# Altium PCB VAMoS PCB RevB.PcbDoc (part 2 of 3)
Units mm, origin at the board's own origin, x right, y up, seen from the top; angles counter-clockwise.
Board outline 96.93 x 94.75 mm, 4 copper layers (Top Signal Layer, Power Plane, Ground Plane, Bottom Signal Layer), stack 1.66 mm thick; 217 components, 103 nets, 623 pads, 255 vias.
Unrouted connection lines stored in the file: 51.
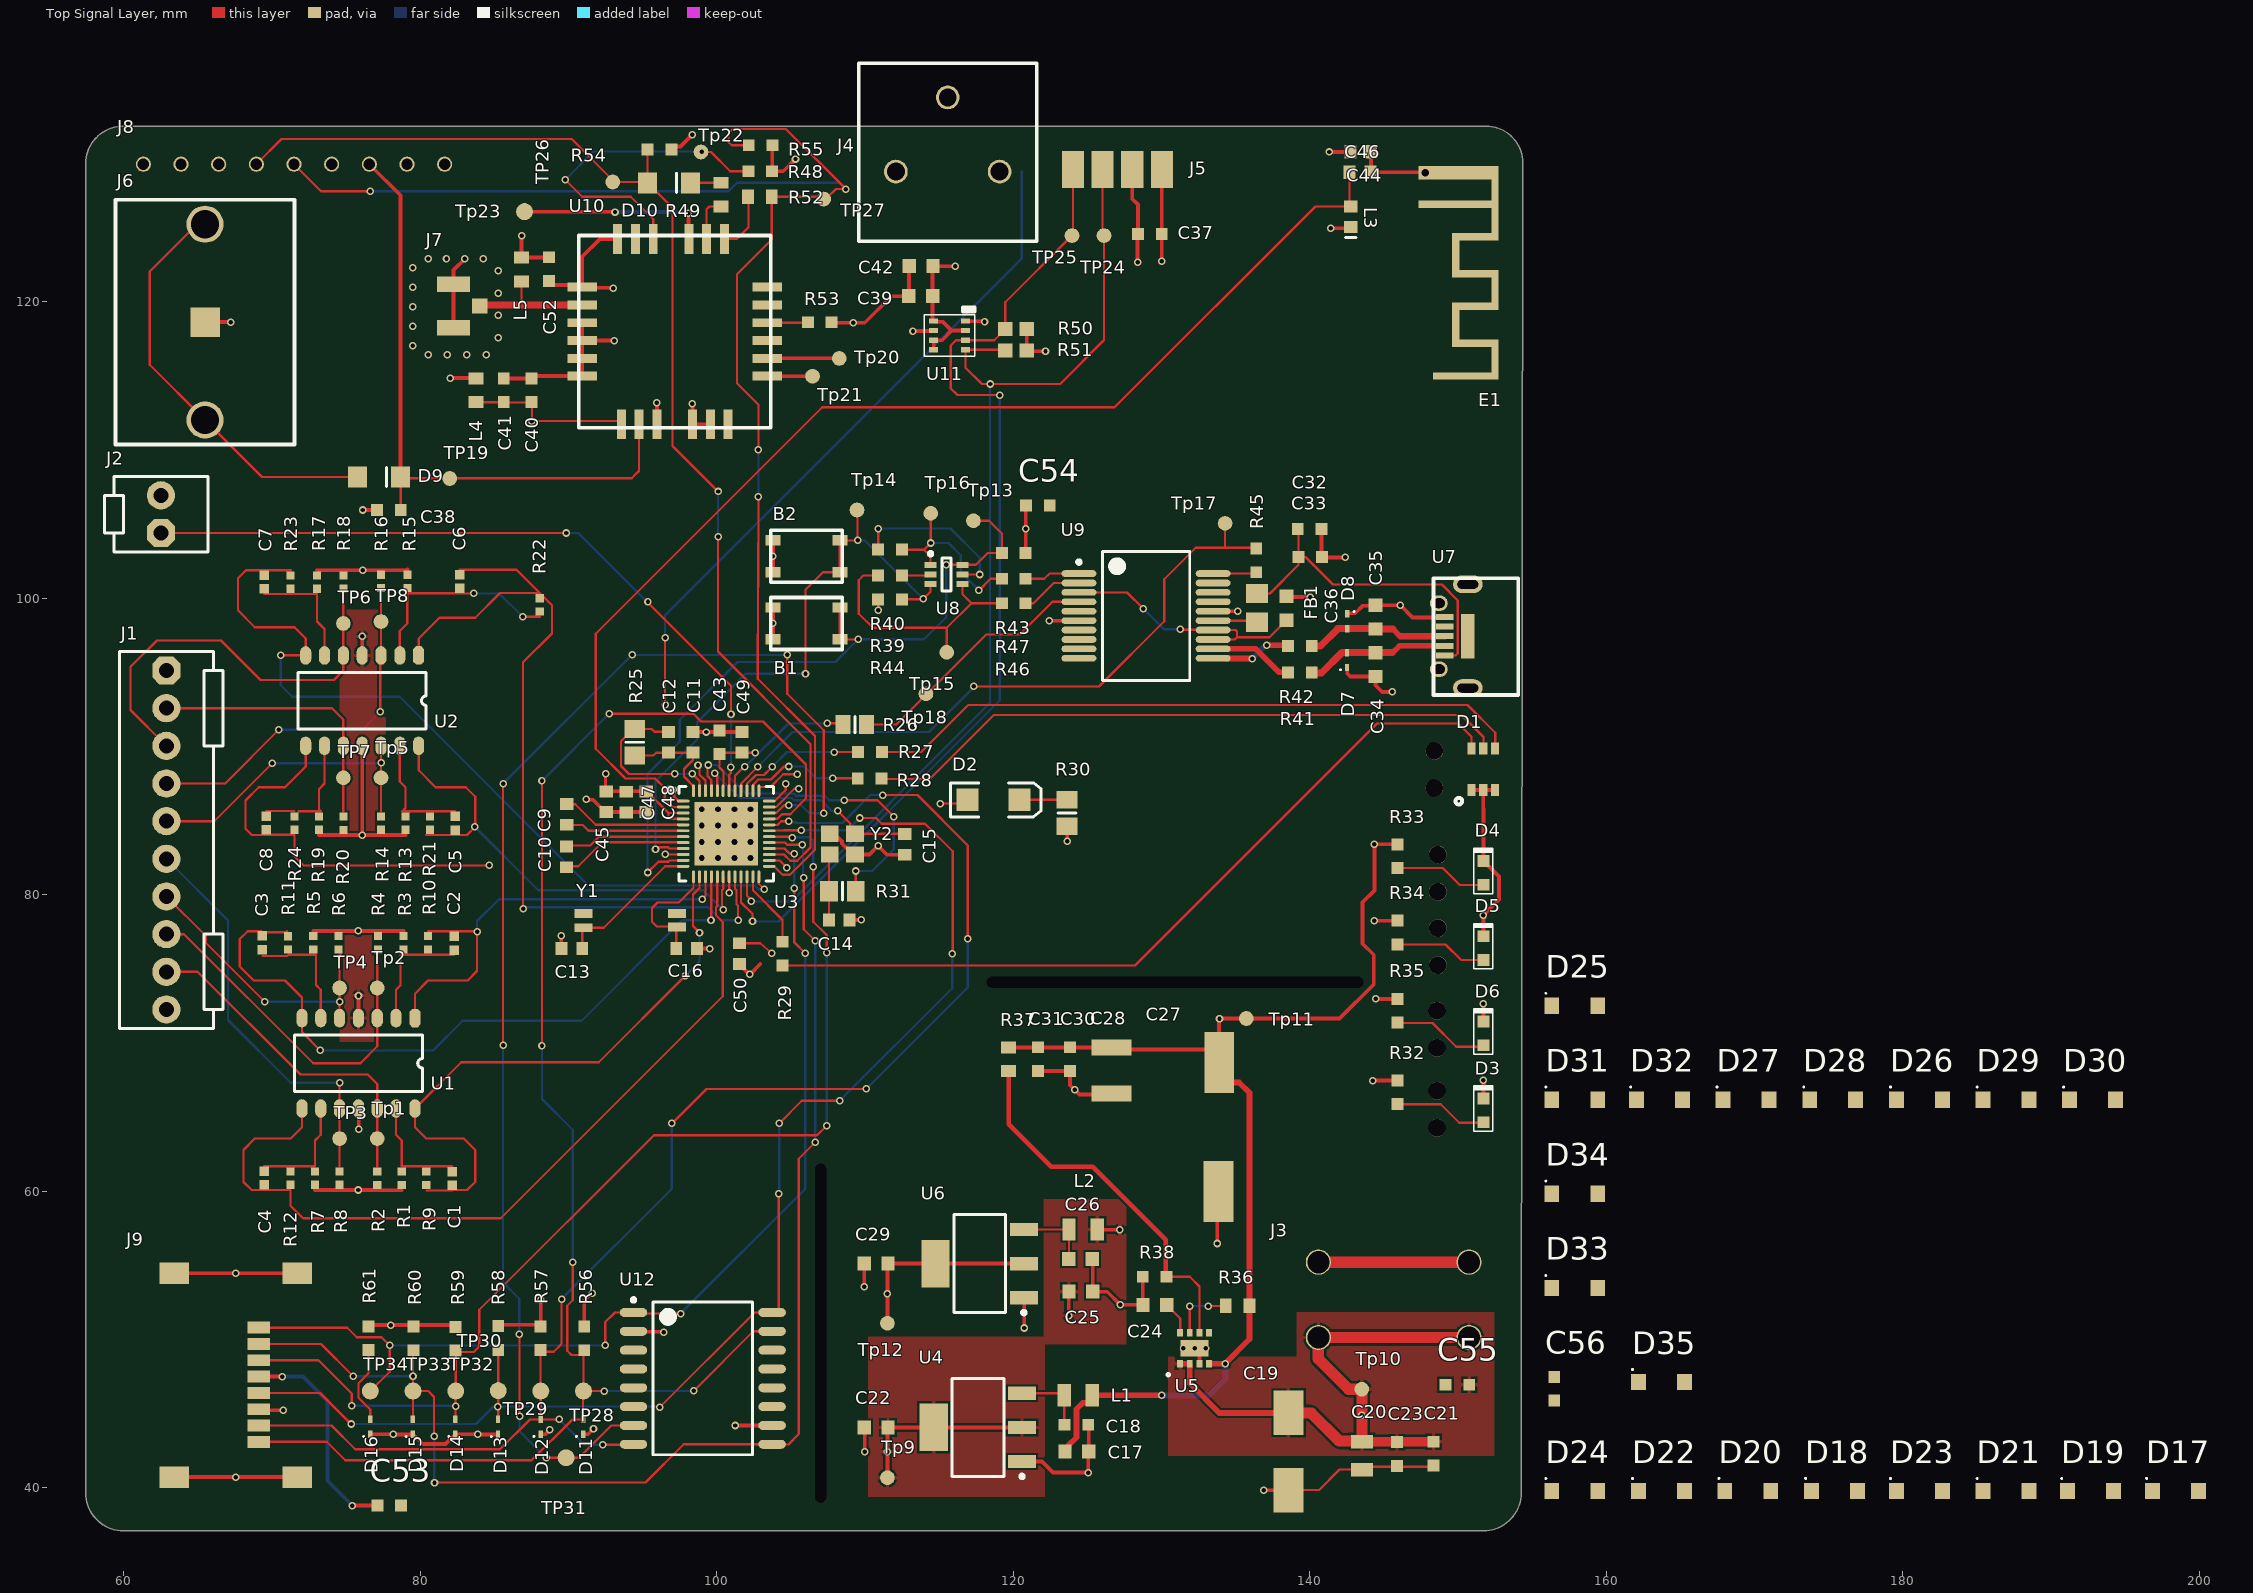
[diagram p0: Top Signal Layer view]

## Part data (continued)
R27 R28 R29: library part 1K00_0603_0.1W, "RES 1K Ohm ±5%, 0.25W,1/4W 0603", Manufacturer=Rohm, Manufacturer Part Number=ESR03EZPJ102, Operating Temperature="-55°C ~ 155°C", Package / Case="0603 (1608 Metric)", Power (Watts)="0.25W, 1/4W", Resistance (Ohms)=1k, Standard Package=1, Supplier Part Number 1=311-165HRCT-ND, Temperature Coefficient=±200ppm/°C, Tolerance=±5%, Category=Resistors, ComponentLink1Description=https://datasheet.ciiva.com/2469/esr-2469603.pdf, ComponentLink1URL=https://datasheet.ciiva.com/2469/esr-2469603.pdf, ComponentLink2Description=https://datasheet.ciiva.com/2469/esr-2469604.pdf, ComponentLink2URL=https://datasheet.ciiva.com/2469/esr-2469604.pdf, ComponentLink3Description=https://datasheet.ciiva.com/2469/esr-2469605.pdf, ComponentLink3URL=https://datasheet.ciiva.com/2469/esr-2469605.pdf, Composition="Thick Film", EDA / CAD Models="Download from Accelerated Designs", Family="Chip Resistor - Surface Mount", Featured Product="ROHM Chip Resistors", Features="Automotive AEC-Q200, Pulse Withstanding", Height="0.022\" (0.55mm)", Number of Terminations=2, Online Catalog="ESR03 Series", Other Names=RHM1.0KDDKR, Packaging="Cut Tape (CT)", Pricing 1="1=0.11, 10=0.098, 100=0.0378, 1000=0.0166, 2500=0.0144 (USD)", Product Training Modules="Resistor Products Overview", Series=ESR, Size / Dimension="0.063\" L x 0.031\" W (1.60mm x 0.80mm)", Stock 1=63701, Supplier 1=Digi-Key, Supplier Device Package="0603 (1608 Metric)", TZOA PN=209-00007
R30: library part Res1, "Resistor", Supplier Part Number 1=P330GCT-ND
R31: library part Res1, "Resistor", Supplier Part Number 1=P0.0GCT-ND, LatestRevisionDate=17-Jul-2002, LatestRevisionNote="Re-released for DXP Platform.", PackageDescription="Axial Device, Thru-Hole; 2 Leads; 0.3 in Pin Spacing", PackageReference=AXIAL-0.3, Published=8-Jun-2000, Publisher="Altium Limited"
R32: library part 1K00_0603_0.1W, "RES 1K Ohm ±5%, 0.25W,1/4W 0603", Manufacturer=Rohm, Manufacturer Part Number=RC0603FR-07560RL, Operating Temperature="-55°C ~ 155°C", Package / Case="0603 (1608 Metric)", Power (Watts)="0.25W, 1/4W", Resistance (Ohms)=1k, Standard Package=1, Supplier Part Number 1=311-1.20KHRCT-ND, Temperature Coefficient=±200ppm/°C, Tolerance=±5%, Category=Resistors, ComponentLink1Description=https://datasheet.ciiva.com/2469/esr-2469603.pdf, ComponentLink1URL=https://datasheet.ciiva.com/2469/esr-2469603.pdf, ComponentLink2Description=https://datasheet.ciiva.com/2469/esr-2469604.pdf, ComponentLink2URL=https://datasheet.ciiva.com/2469/esr-2469604.pdf, ComponentLink3Description=https://datasheet.ciiva.com/2469/esr-2469605.pdf, ComponentLink3URL=https://datasheet.ciiva.com/2469/esr-2469605.pdf, Composition="Thick Film", Digikey PN=311-1.20KHRCT-ND, EDA / CAD Models="Download from Accelerated Designs", Family="Chip Resistor - Surface Mount", Featured Product="ROHM Chip Resistors", Features="Automotive AEC-Q200, Pulse Withstanding", Height="0.022\" (0.55mm)", Number of Terminations=2, Online Catalog="ESR03 Series", Other Names=RHM1.0KDDKR, Packaging="Cut Tape (CT)", Pricing 1="1=0.11, 10=0.098, 100=0.0378, 1000=0.0166, 2500=0.0144 (USD)", Product Training Modules="Resistor Products Overview", Series=ESR, Size / Dimension="0.063\" L x 0.031\" W (1.60mm x 0.80mm)", Stock 1=63701, Supplier 1=Digi-Key, Supplier Device Package="0603 (1608 Metric)", TZOA PN=209-00007
R33 R34: library part 1K00_0603_0.1W, "RES 1K Ohm ±5%, 0.25W,1/4W 0603", Manufacturer=Rohm, Manufacturer Part Number=RC0603FR-07560RL, Operating Temperature="-55°C ~ 155°C", Package / Case="0603 (1608 Metric)", Power (Watts)="0.25W, 1/4W", Resistance (Ohms)=1k, Standard Package=1, Supplier Part Number 1=311-560HRCT-ND, Temperature Coefficient=±200ppm/°C, Tolerance=±5%, Category=Resistors, ComponentLink1Description=https://datasheet.ciiva.com/2469/esr-2469603.pdf, ComponentLink1URL=https://datasheet.ciiva.com/2469/esr-2469603.pdf, ComponentLink2Description=https://datasheet.ciiva.com/2469/esr-2469604.pdf, ComponentLink2URL=https://datasheet.ciiva.com/2469/esr-2469604.pdf, ComponentLink3Description=https://datasheet.ciiva.com/2469/esr-2469605.pdf, ComponentLink3URL=https://datasheet.ciiva.com/2469/esr-2469605.pdf, Composition="Thick Film", Digikey PN=311-560HRCT-ND, EDA / CAD Models="Download from Accelerated Designs", Family="Chip Resistor - Surface Mount", Featured Product="ROHM Chip Resistors", Features="Automotive AEC-Q200, Pulse Withstanding", Height="0.022\" (0.55mm)", Number of Terminations=2, Online Catalog="ESR03 Series", Other Names=RHM1.0KDDKR, Packaging="Cut Tape (CT)", Pricing 1="1=0.11, 10=0.098, 100=0.0378, 1000=0.0166, 2500=0.0144 (USD)", Product Training Modules="Resistor Products Overview", Series=ESR, Size / Dimension="0.063\" L x 0.031\" W (1.60mm x 0.80mm)", Stock 1=63701, Supplier 1=Digi-Key, Supplier Device Package="0603 (1608 Metric)", TZOA PN=209-00007
R35: library part 1K00_0603_0.1W, "RES 1K Ohm ±5%, 0.25W,1/4W 0603", Manufacturer=Rohm, Manufacturer Part Number=RC0603FR-07560RL, Operating Temperature="-55°C ~ 155°C", Package / Case="0603 (1608 Metric)", Power (Watts)="0.25W, 1/4W", Resistance (Ohms)=1k, Standard Package=1, Supplier Part Number 1=311-330HRCT-ND, Temperature Coefficient=±200ppm/°C, Tolerance=±5%, Category=Resistors, ComponentLink1Description=https://datasheet.ciiva.com/2469/esr-2469603.pdf, ComponentLink1URL=https://datasheet.ciiva.com/2469/esr-2469603.pdf, ComponentLink2Description=https://datasheet.ciiva.com/2469/esr-2469604.pdf, ComponentLink2URL=https://datasheet.ciiva.com/2469/esr-2469604.pdf, ComponentLink3Description=https://datasheet.ciiva.com/2469/esr-2469605.pdf, ComponentLink3URL=https://datasheet.ciiva.com/2469/esr-2469605.pdf, Composition="Thick Film", Digikey PN=311-330HRCT-ND, EDA / CAD Models="Download from Accelerated Designs", Family="Chip Resistor - Surface Mount", Featured Product="ROHM Chip Resistors", Features="Automotive AEC-Q200, Pulse Withstanding", Height="0.022\" (0.55mm)", Number of Terminations=2, Online Catalog="ESR03 Series", Other Names=RHM1.0KDDKR, Packaging="Cut Tape (CT)", Pricing 1="1=0.11, 10=0.098, 100=0.0378, 1000=0.0166, 2500=0.0144 (USD)", Product Training Modules="Resistor Products Overview", Series=ESR, Size / Dimension="0.063\" L x 0.031\" W (1.60mm x 0.80mm)", Stock 1=63701, Supplier 1=Digi-Key, Supplier Device Package="0603 (1608 Metric)", TZOA PN=209-00007
R36: library part 100K_0603_0.1W, "Res,SMD,0603,1/10W,100K,1%", Manufacturer="Panasonic Electronic Components", Manufacturer Part Number=ERJ-3EKF1003V, Operating Temperature="-55°C ~ 155°C", Package / Case="0603 (1608 Metric)", Package Quantity=5000, Power (Watts)="0.1W, 1/10W", Resistance (Ohms)=100k, Supplier Device Package=0603, Supplier Part Number 1=P100KHCT-ND, Temperature Coefficient=±100ppm/°C, Tolerance=±1%, Category=Resistors, ComponentLink1Description=http://industrial.panasonic.com/www-cgi/jvcr13pz.cgi?E+PZ+3+AOA0002+ERJ3EKF1003V+7+WW, ComponentLink1URL=http://industrial.panasonic.com/www-cgi/jvcr13pz.cgi?E+PZ+3+AOA0002+ERJ3EKF1003V+7+WW, ComponentLink2Description=https://www.arrow.com/en/products/erj3ekf1003v/panasonic/, ComponentLink2URL=https://www.arrow.com/en/products/erj3ekf1003v/panasonic/, Composition="Thick Film", Features="Automotive AEC-Q200", Height="0.022\" (0.55mm)", ID=2248337, Number of Terminations=2, Packaging="Cut Tape (CT)", Pricing 1="1=0.15, 50=0.0172, 100=0.0126, 250=0.00968, 500=0.00772, 1000=0.00569 (CAD)", Pricing 2="25000000=0.0023, 50000000=0.0021, 125000000=0.0018, 250000000=0.0016, 1=0.0076, 100=0.0045, 500=0.0039, 1000=0.0037, 3000=0.0028 (USD)", RoHS="RoHS Compliant", Size / Dimension="0.063\" L x 0.031\" W (1.60mm x 0.80mm)", Stock 1=3169201, Stock 2=2022544, Supplier 1=Digi-Key, Supplier 2=Arrow, Supplier Part Number 2=eZfyx1EtlYvVlf_vmAjt5OXN30qpr715i1xCyp5r5nQ
R37: library part 71K5_0603_1/10W, "RES SMD 71.5K OHM 1% 1/10W 0603", Supplier Part Number 1=311-71.5KHRCT-ND, Supplier 1=Digi-Key
R38 R48 R53 R54 R55: library part 1K00_0603_0.1W, "RES 1K Ohm ±5%, 0.25W,1/4W 0603", Manufacturer=Rohm, Manufacturer Part Number=ESR03EZPJ102, Operating Temperature="-55°C ~ 155°C", Package / Case="0603 (1608 Metric)", Power (Watts)="0.25W, 1/4W", Resistance (Ohms)=1k, Standard Package=1, Supplier Part Number 1=311-10.0KHRCT-ND, Temperature Coefficient=±200ppm/°C, Tolerance=±5%, Category=Resistors, ComponentLink1Description=https://datasheet.ciiva.com/2469/esr-2469603.pdf, ComponentLink1URL=https://datasheet.ciiva.com/2469/esr-2469603.pdf, ComponentLink2Description=https://datasheet.ciiva.com/2469/esr-2469604.pdf, ComponentLink2URL=https://datasheet.ciiva.com/2469/esr-2469604.pdf, ComponentLink3Description=https://datasheet.ciiva.com/2469/esr-2469605.pdf, ComponentLink3URL=https://datasheet.ciiva.com/2469/esr-2469605.pdf, Composition="Thick Film", EDA / CAD Models="Download from Accelerated Designs", Family="Chip Resistor - Surface Mount", Featured Product="ROHM Chip Resistors", Features="Automotive AEC-Q200, Pulse Withstanding", Height="0.022\" (0.55mm)", Number of Terminations=2, Online Catalog="ESR03 Series", Other Names=RHM1.0KDDKR, Packaging="Cut Tape (CT)", Pricing 1="1=0.11, 10=0.098, 100=0.0378, 1000=0.0166, 2500=0.0144 (USD)", Product Training Modules="Resistor Products Overview", Series=ESR, Size / Dimension="0.063\" L x 0.031\" W (1.60mm x 0.80mm)", Stock 1=63701, Supplier 1=Digi-Key, Supplier Device Package="0603 (1608 Metric)", TZOA PN=209-00007
R39 R40 R46 R47: library part 1K00_0603_0.1W, "RES 1K Ohm ±5%, 0.25W,1/4W 0603", Manufacturer=Rohm, Manufacturer Part Number=ESR03EZPJ102, Supplier Device Package="0603 (1608 Metric)", Supplier Part Number 1=RHM1.0KDCT-ND, Temperature Coefficient=±200ppm/°C, Tolerance=±5%, ComponentLink1Description=https://datasheet.ciiva.com/2469/esr-2469603.pdf, ComponentLink1URL=https://datasheet.ciiva.com/2469/esr-2469603.pdf, ComponentLink2Description=https://datasheet.ciiva.com/2469/esr-2469604.pdf, ComponentLink2URL=https://datasheet.ciiva.com/2469/esr-2469604.pdf, ComponentLink3Description=https://datasheet.ciiva.com/2469/esr-2469605.pdf, ComponentLink3URL=https://datasheet.ciiva.com/2469/esr-2469605.pdf, Supplier 1=Digi-Key
  R39 R40: TZOA PN=209-00007
R41 R42: library part 1K00_0603_0.1W, "RES 1K Ohm ±5%, 0.25W,1/4W 0603", Manufacturer=Rohm, Manufacturer Part Number=RMCF0603JT27R0, ComponentLink1Description=https://datasheet.ciiva.com/2469/esr-2469603.pdf, ComponentLink1URL=https://datasheet.ciiva.com/2469/esr-2469603.pdf, ComponentLink2Description=https://datasheet.ciiva.com/2469/esr-2469604.pdf, ComponentLink2URL=https://datasheet.ciiva.com/2469/esr-2469604.pdf, ComponentLink3Description=https://datasheet.ciiva.com/2469/esr-2469605.pdf, ComponentLink3URL=https://datasheet.ciiva.com/2469/esr-2469605.pdf
R43 R44: library part 1K00_0603_0.1W, "RES 1K Ohm ±5%, 0.25W,1/4W 0603", Manufacturer=Rohm, Manufacturer Part Number=ESR03EZPJ103, ComponentLink1Description=https://datasheet.ciiva.com/2469/esr-2469603.pdf, ComponentLink1URL=https://datasheet.ciiva.com/2469/esr-2469603.pdf, ComponentLink2Description=https://datasheet.ciiva.com/2469/esr-2469604.pdf, ComponentLink2URL=https://datasheet.ciiva.com/2469/esr-2469604.pdf, ComponentLink3Description=https://datasheet.ciiva.com/2469/esr-2469605.pdf, ComponentLink3URL=https://datasheet.ciiva.com/2469/esr-2469605.pdf
R45: library part 1K00_0603_0.1W, "RES 1K Ohm ±5%, 0.25W,1/4W 0603", Manufacturer=Rohm, Manufacturer Part Number=ESR03EZPJ102, ComponentLink1Description=https://datasheet.ciiva.com/2469/esr-2469603.pdf, ComponentLink1URL=https://datasheet.ciiva.com/2469/esr-2469603.pdf, ComponentLink2Description=https://datasheet.ciiva.com/2469/esr-2469604.pdf, ComponentLink2URL=https://datasheet.ciiva.com/2469/esr-2469604.pdf, ComponentLink3Description=https://datasheet.ciiva.com/2469/esr-2469605.pdf, ComponentLink3URL=https://datasheet.ciiva.com/2469/esr-2469605.pdf
R49 R52: library part 470R_0603_?W, "Res,SMD,1/10W,470R,0603", Supplier Part Number 1=311-470GRCT-ND
R50 R51: "Thick Film Resistor", Manufacturer="Panasonic Electronic Components", Manufacturer Part Number=ERJ-PA3J103V, ComponentLink1Description=http://media.digikey.com/pdf/Data%20Sheets/Panasonic%20Electronic%20Components/ERJ_PA2_P03_PA3_P06_P08_P14.pdf, ComponentLink1URL=http://media.digikey.com/pdf/Data%20Sheets/Panasonic%20Electronic%20Components/ERJ_PA2_P03_PA3_P06_P08_P14.pdf, ComponentLink2Description=https://www.arrow.com/en/products/erj-pa3j103v/panasonic/, ComponentLink2URL=https://www.arrow.com/en/products/erj-pa3j103v/panasonic/
R56 R57 R58 R59 R60 R61: library part 1K00_0603_0.1W, "RES 1K Ohm ±5%, 0.25W,1/4W 0603", Manufacturer=Panasonic, Manufacturer Part Number=ERJ-2RKF1002X, ComponentLink1Description=https://datasheet.ciiva.com/2469/esr-2469603.pdf, ComponentLink1URL=https://datasheet.ciiva.com/2469/esr-2469603.pdf, ComponentLink2Description=https://datasheet.ciiva.com/2469/esr-2469604.pdf, ComponentLink2URL=https://datasheet.ciiva.com/2469/esr-2469604.pdf, ComponentLink3Description=https://datasheet.ciiva.com/2469/esr-2469605.pdf, ComponentLink3URL=https://datasheet.ciiva.com/2469/esr-2469605.pdf
Tp1 Tp2 TP3 TP4 Tp5 TP6 TP7 TP8 Tp9 Tp10 Tp11 Tp12 Tp13 Tp14 Tp15 Tp16 Tp17 Tp18 TP19 Tp20 Tp21 Tp22 TP24 TP25 TP26 TP27 TP28 TP29 TP30 TP31 TP32 TP33 TP34: library part TP_SMD_39MIL, "SMD Test Pad", Manufacturer="No P/N Required", Fast Supplier="No P/N Required", Fast Supplier P/N="No P/N Required", Manufacturer P/N="No P/N Required", P/N="No P/N", UM=EA
Tp23: library part TP_SMD_45MIL, "SMD Test Pad", Manufacturer="No P/N Required", Fast Supplier="No P/N Required", Fast Supplier P/N="No P/N Required", Manufacturer P/N="No P/N Required", P/N="No P/N", UM=EA
U1 U2: "Quad opamplifiers", Manufacturer="National Semi", Manufacturer Part Number=LMC660CMX/NOPB, Supplier Part Number 1=LMC660CMX/NOPBCT-ND, Price=$2.33, Supplier="Digi Key"
U3: library part ESP32, "Microcontroller", Manufacturer="Espressif Systems", Manufacturer Part Number=ESP32-D0WDQ6, Supplier Part Number 1=1904-1004-1-ND
U4: library part ZLDO1117, "1A 3.3V LDO", Manufacturer="Diodes Incorporated", Supplier Part Number 1=ZLDO1117G50DICT-ND, Manufacturer Part Number=ZLDO1117G50TA, Supplier 1=Digi-Key
U5: "DC-DC: 0.9-6V 2A output, 3-17V input. Non-isolated.", Distributor Part Number=296-47089-1-ND, Manufacturer="Texas Instruments", Manufacturer Part Number=TPS82140SILT, ComponentLink1Description=wefwef, ComponentLink1URL=https://www.digikey.ca/product-detail/en/texas-instruments/TPS82140SILT/296-47089-1-ND/7596470, Digikey PN=296-47089-1-ND, Distributor=Digi-Key, Supplier Part Number 1=296-47089-1-ND
U6: library part ZLDO1117, "1A 3.3V LDO", Manufacturer="Diodes Incorporated", Supplier Part Number 1=ZLDO1117QG33TADICT-ND, Manufacturer Part Number=ZLDO1117QG33TA, Supplier 1=Digi-Key
U7: library part "USB Shield", Manufacturer=CUI, Manufacturer Part Number=UJ2-MIBH2-4-SMT-TR, Supplier Part Number 1=102-4007-1-ND
U8: library part MBT3904DW1, "Dual NPN Transistors", Manufacturer="ON Semiconductor", Manufacturer Part Number=SMBT3904DW1T1G, Supplier Part Number 1=MBT3904DW1T1GOSCT-ND
U9: "USB-UART Interface", Manufacturer=FTDI, Manufacturer Part Number=FT231XS-R, Supplier Part Number 1=768-1129-1-ND
U10: "GPS Module", Manufacturer="Sierra Wireless", Manufacturer Part Number=XA1100_1103872, Supplier Part Number 1=1645-1094-1-ND, Supplier 1=Digi-Key
U11: "SENSOR Humidity Temperature 0 ~ 100% RH I²C SPI ±3% 1s 8-Pin LGA", Manufacturer=Bosch, Supplier Part Number 1=828-1063-1-ND, Manufacturer Part Number=BME280, Supplier 1=Digi-Key
U12: "QSPI 128M Flash Memory", Manufacturer="Cypress Semiconductor", Manufacturer Part Number=S25FL128SAGMFV003, Supplier Part Number 1=428-4133-1-ND
Y1: "32.768 kHz Crystal", Supplier Part Number 1=SER2416CT-ND
Y2: library part Y1, "40MHz Crystal Oscillator", Supplier Part Number 1=SER4045CT-ND
L3: Code_IEC=1005, Code_JEITA=0402, LatestRevisionDate=29-May-2009, LatestRevisionNote="IPC-7351 Footprint Added.", PackageDescription="Chip Inductor", PackageReference=0402-A, Published=8-Jun-2000, Publisher="Altium Limited", Supplier Link=490-1103-1-ND

## Free pads (board coordinates)
  round 1.19 hole 1.19 unplated: 0(148.39,87.2) 0(148.39,89.7) 0(148.575,64.275) 0(148.575,66.775) 0(148.575,69.675) 0(148.575,72.175) 0(148.625,75.25) 0(148.625,77.75) 0(148.625,80.2) 0(148.625,82.7)
  round 0 hole 0.762 slot 22.86 at 90 deg: 2(107,50.425)
  round 0 hole 0.762 slot 25.4 at 0 deg: 2(130.9,74.1)

## Via types
v1: diameter 0.508, hole 0.3, Top Signal Layer to Bottom Signal Layer, 238 vias
v2: diameter 0.7, hole 0.4, Top Signal Layer to Bottom Signal Layer, 16 vias
v3: diameter 0.7, hole 0.5, Top Signal Layer to Bottom Signal Layer, 1 vias

## Nets (pads, with @x,y where several pads share a name; then routed paths per layer and width w, separated by ;. In a path a pad name is that pad's centre, name@x,y a point inside that pad or via, vN(x,y) a via of type N, cw(c..) or ccw(c..) an arc to the next point about the centre after c; other vN are vias at no path point)
3V3: C29.2 C37.2 C39.2 C42.2 C43.2 C45.2 C47.2 C48.2 C49.2 C50.2 C52.2 C53.2 C54.2 C56.2 D26.1 D29.1 D32.1 D35.1 J4.2 J5.1 J8.8 J9.4 L4.1 L5.2 R35.2 R43.2 R44.2 R48.2 R50.2 R51.2 R54.2 R55.2 R56.2 R57.2 R58.2 R59.2 R60.2 R61.2 Tp12.1 U3.1 U3.3 U3.4 U3.19 U3.26 U3.37 U3.43 U3.46 U6.2 U11.2 U11.5 U11.6 U11.8 U12.2 | length 102.2
  Top Signal Layer w0.152: C48.2@95.275,86.975 96.734,85.516 ; U3.4@97.724,85.118 96.734,85.118 96.734,85.516 ; U3.3@97.726,85.516 96.734,85.516 ; v1(98.725,88.725) 98.83,88.62 98.83,88.097 99.226,87.702 U3.46@99.226,87.016 ; U3.43@100.442,87.25 100.442,88.308 100.168,88.582 100.168,89.585 C49.2@101.692,89.585 101.692,89.575 v1(102.6,89.575) ; v1(100.825,80.125) U3.19@100.826,81.216 ; C50.2@101.524,76.726 102.921,76.726 v1(103.7,76.05) ; U3.37@102.826,87.016 102.826,87.243 102.848,87.265 103.616,87.265 104.476,88.125 v1(105.425,88.125) ; U3.26@103.526,82.316 104.234,82.316 v1(104.725,81.825) ; v1(110.875,99.175) R44.2@110.875,99.925
  Top Signal Layer w0.203: v1(92.5,88.175) 92.5,87 C45.2@92.525,86.975 ; v1(97.05,87.075) 97.108,87.017 97.108,86.612 97.404,86.316 U3.1@97.726,86.316 ; U3.4@97.724,85.118 U3.4@97.726,85.116
  Top Signal Layer w0.254: J9.4@69.088,47.498 70.673,47.498 v1(70.675,47.5) ; v1(75.4,38.8) C53.2@77.1,38.8 ; R61.2@76.496,50.98 82.345,50.98 R59.2@82.375,50.95 ; v1(82.025,114.85) 83.725,114.85 L4.1@83.75,114.825 ; R58.2@85.25,51 88.08,51 88.1,50.98 88.125,51.005 v1(88.125,52.675) ; v1(86.825,124.45) L5.2@86.825,122.975 88.65,122.975 C52.2@88.675,123 ; R56.2@91.05,50.975 91.05,52.625 91.55,53.125 v1(91.589,53.125) ; C45.2@92.525,86.975 C47.2@93.9,86.975 ; C47.2@93.875,86.95 C47.2@93.9,86.975 ; U12.2@94.375,50.55 94.4,50.525 96.4,50.525 v1(96.425,50.5) ; C48.2@95.275,86.975 C48.2@95.225,86.975 C47.2@93.9,86.975 ; R54.2@96.925,130.275 97.128,130.478 97.553,130.478 v1(98.325,131.25) ; R55.2@103.75,130.55 103.725,130.525 R48.2@103.725,128.8 104.475,128.8 v1(105.3,129.625) ; Tp12.1@111.5,51.1 v1(111.5,53.087) 111.5,55.074 C29.2@111.544,55.118 U6.2@114.754,55.118 U6.2@120.704,55.118 ; U11.5@114.622,116.754 U11.6@114.622,117.404 115.179,117.404 115.825,118.05 ; v1(116.075,122.4) C42.2@114.575,122.4 114.55,122.375 C39.2@114.55,120.375 114.55,118.752 114.598,118.704 U11.8@114.622,118.704 114.67,118.656 115.219,118.656 115.657,118.218 115.825,118.05 ; U11.2@116.772,118.054 115.825,118.054 115.825,118.05 ; R43.2@120.822,103.05 120.825,103.053 v1(120.825,104.675) 120.825,106.225 C54.2@120.85,106.25 ; R50.2@120.9,118.15 120.899,118.149 R51.2@120.899,116.701 120.947,116.653 v1(122.163,116.653) ; v1(130,122.725) C37.2@130,124.575 130,128.889 J5.1@130.016,128.905 ; v1(144.45,72.975) R35.2@145.9,72.975
  Bottom Signal Layer w0.254: v1(70.675,47.5) 72.075,47.5 73.725,45.85 73.725,40.475 v1(75.4,38.8)
  other v1: 78,50.95